# EAGLE board jr-support_v3 (EAGLE 8.2.1), part 1 of 2
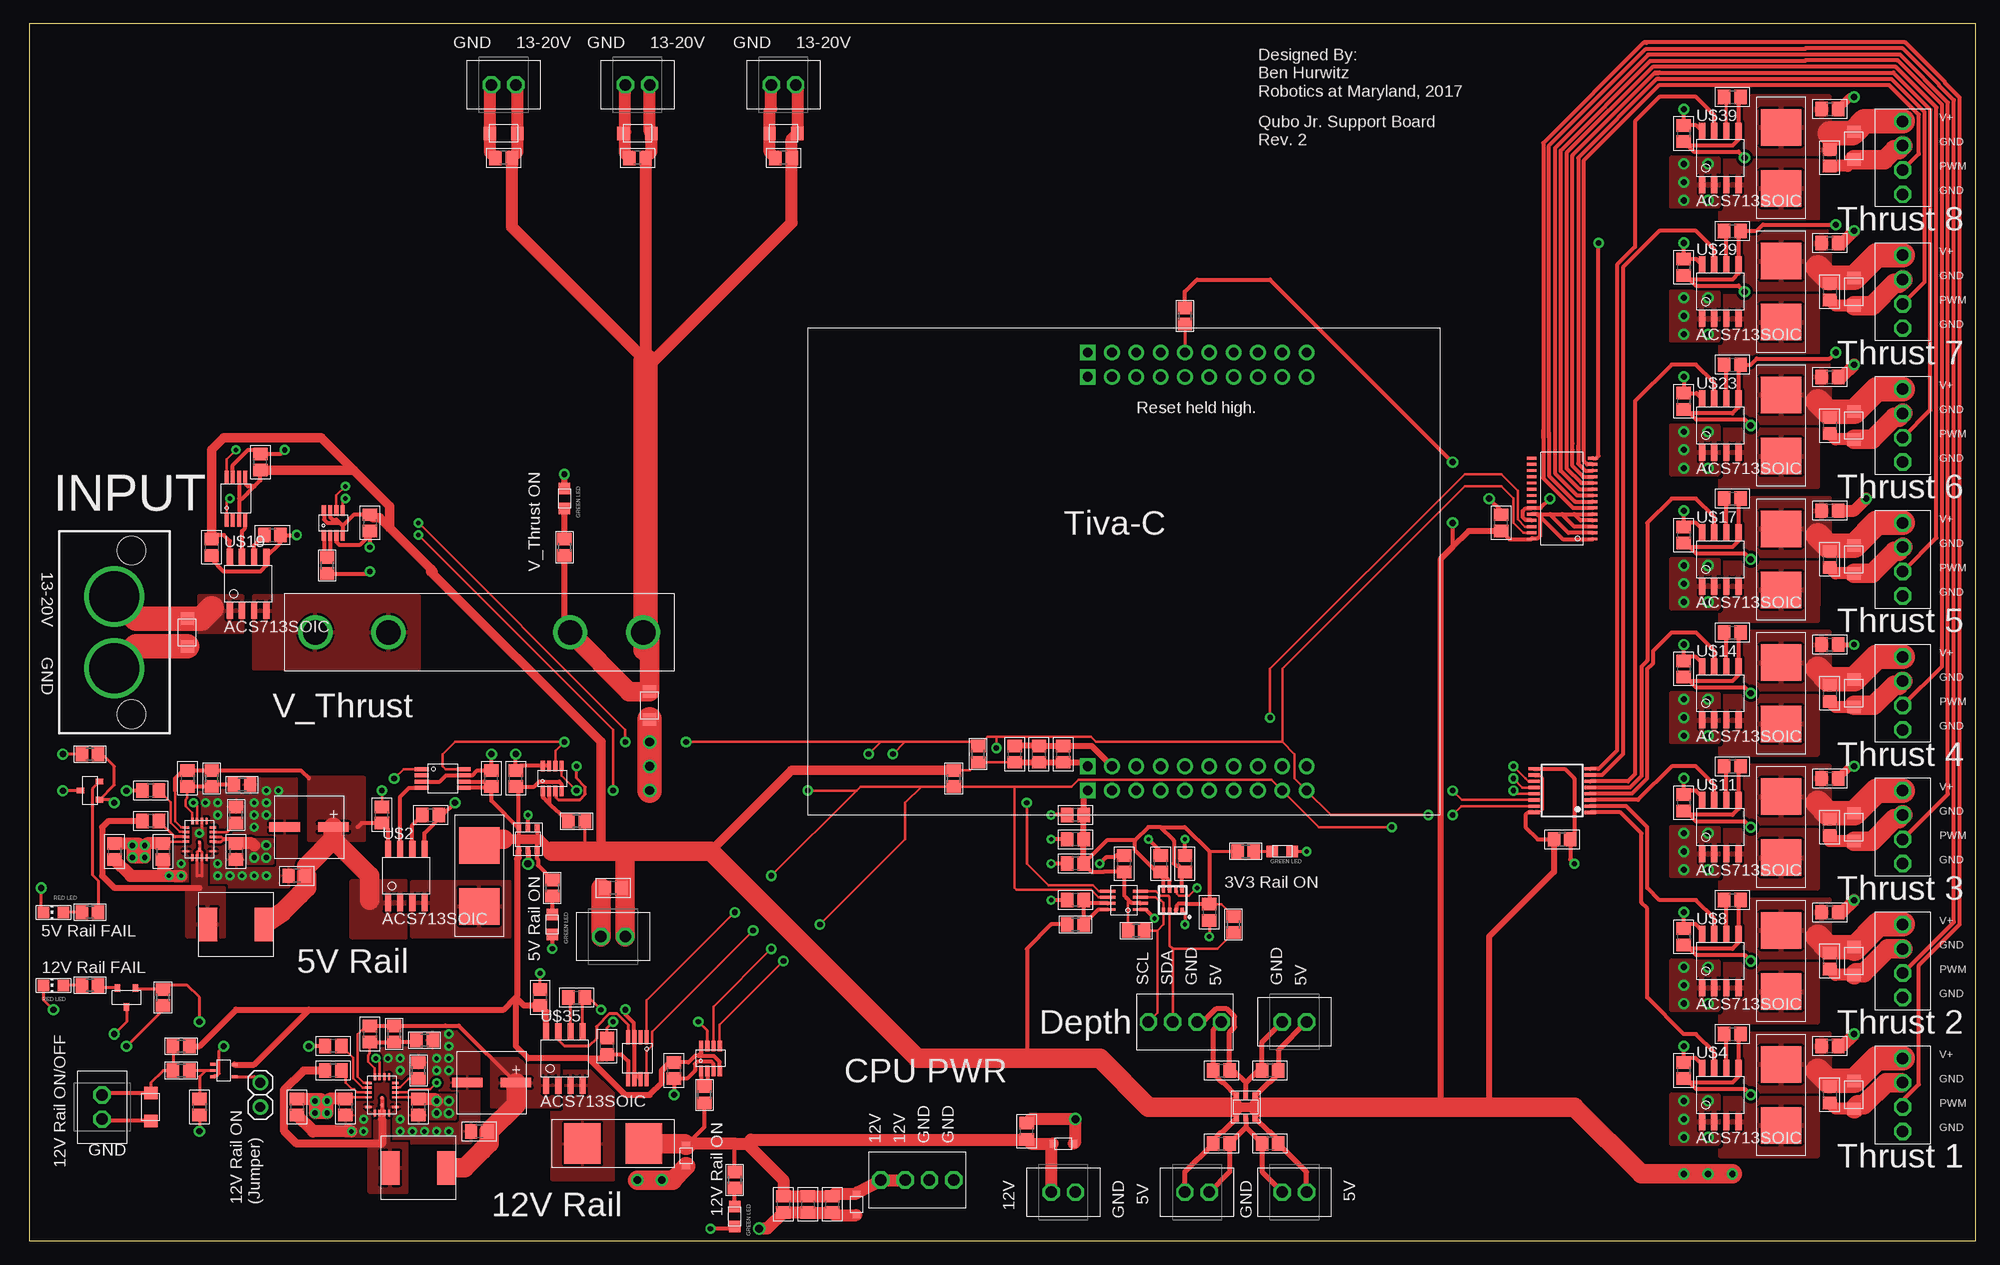
[diagram p0: board, top side]
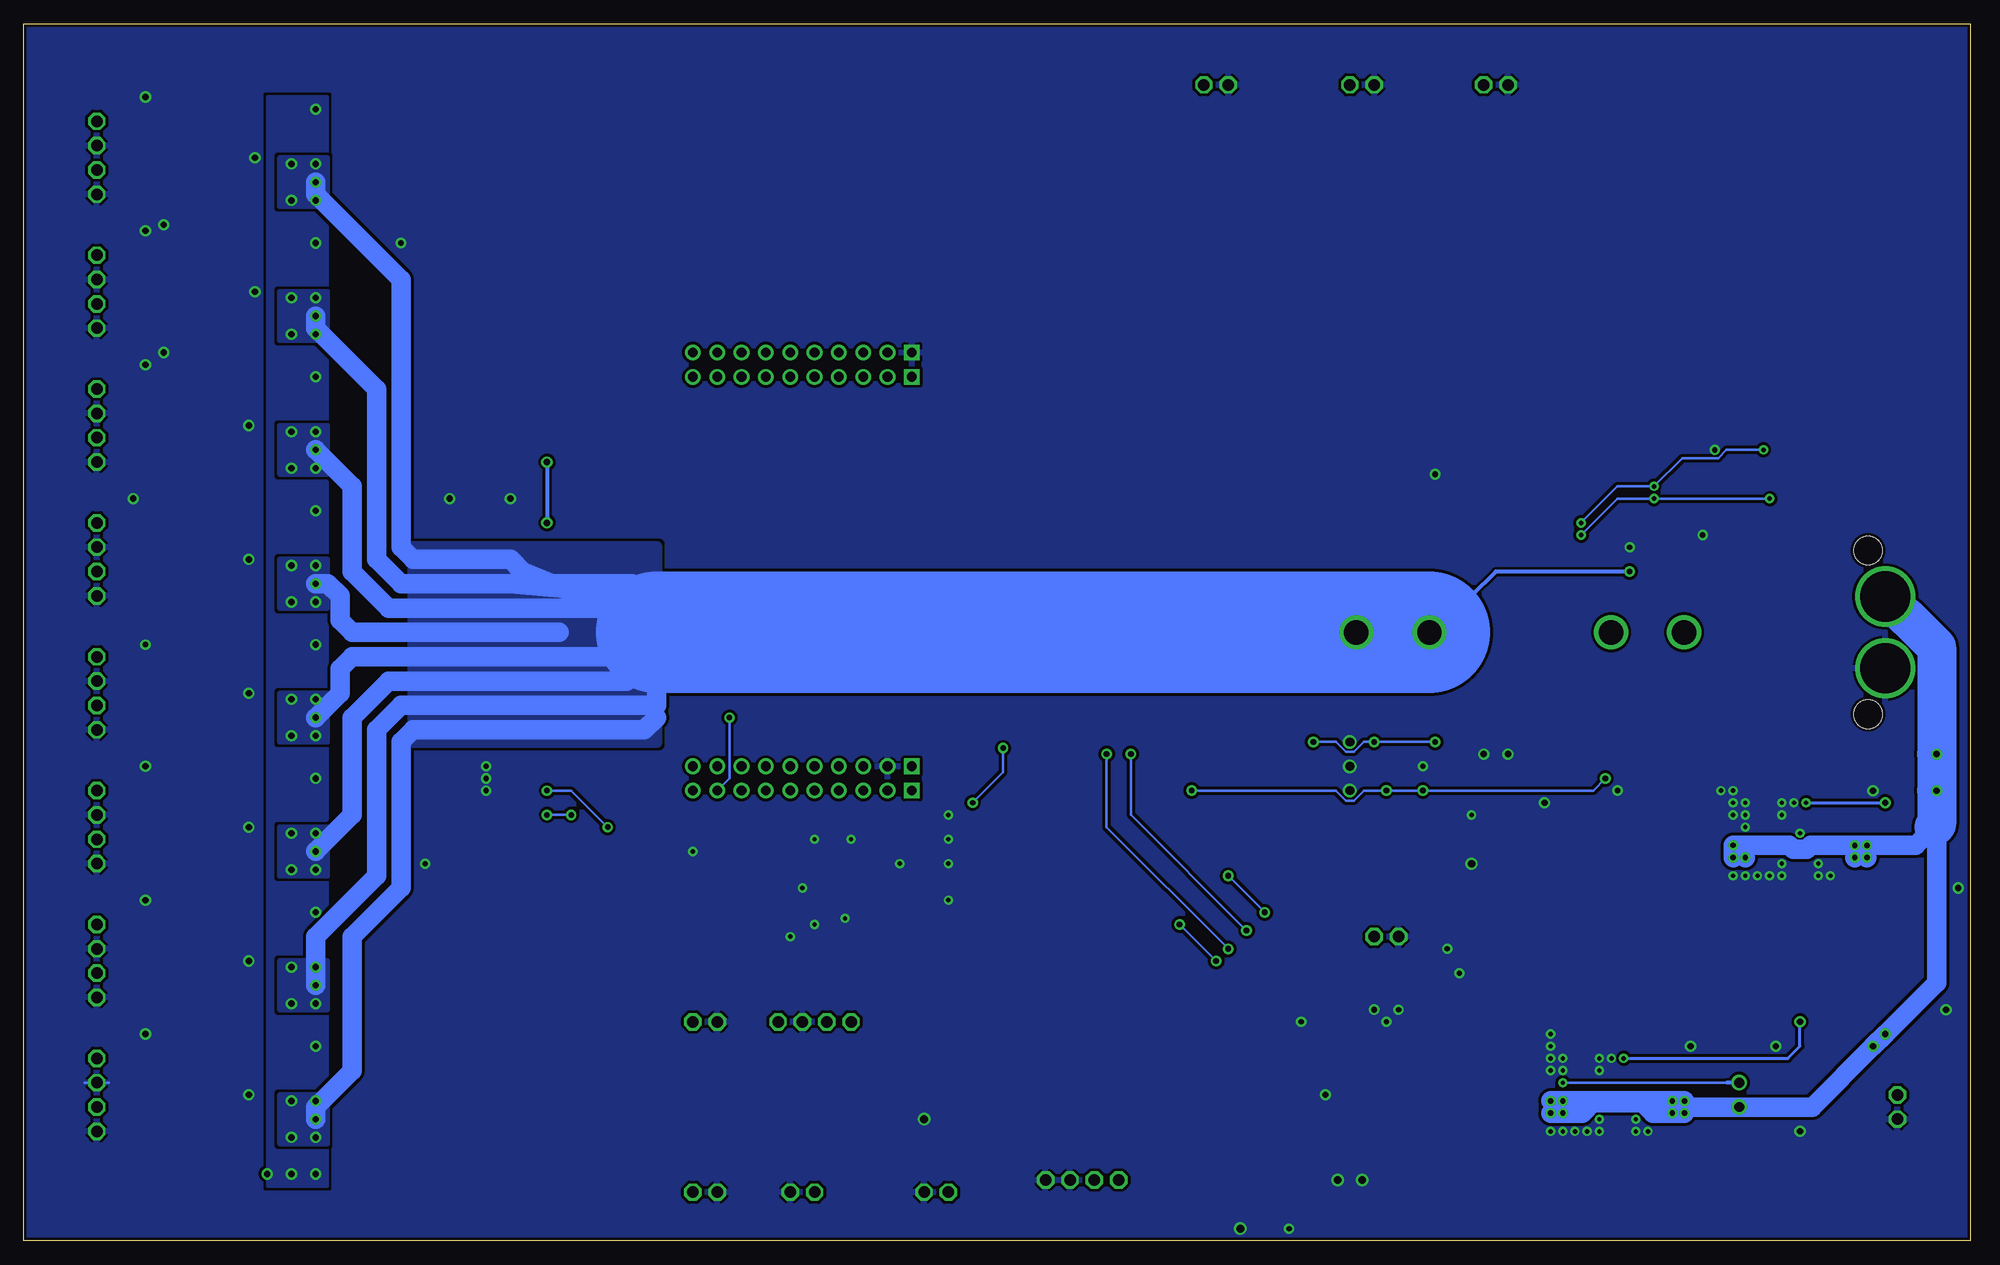
[diagram p1: board, bottom side, seen from below]

Size 203.18 x 127 mm. Coordinates in mm from the lower left corner, seen from the top.
Outline: 0,0 203.18,0 203.18,127 0,127 0,0
Copper layers (1*16): Top 0.035mm / dielectric 1.5mm / Bottom 0.035mm
Design rules "SparkFun *": minimum track width 8mil, minimum drill 15mil, track to track 8mil, track to pad 8mil, pad to pad 8mil, via to via 8mil, smd to smd 8mil, copper to edge 8mil, drill to drill 7mil, minimum pad ring 12mil, minimum via ring 10mil, stop-mask expansion 4mil, vias tented up to drill 20mil, thermal gap 10mil

## Footprints (pad centres in the part's own frame; a part is rotated, then mirrored left to right if it is on the bottom)
0805 = smd 1.2 x 1.2: P$1 -1.05,0; P$2 1.05,0
SOT457 = smd 0.5 x 0.8: P$1 -0.95,-1.15; P$2 0,-1.15; P$3 0.95,-1.15; P$4 0.95,1.15; P$5 0,1.15; P$6 -0.95,1.15
VSSOP-8 = smd 0.42 x 1.45: P$1 -0.975,-2.2; P$2 -0.325,-2.2; P$3 0.325,-2.2; P$4 0.975,-2.2; P$5 0.975,2.2; P$6 0.325,2.2; P$7 -0.325,2.2; P$8 -0.975,2.2
KK254_VERT_2PIN = drill 1.2 octagon: P$1 1.27,0; P$2 -1.27,0
CHIP-LED0805 = smd 1.2 x 1.2: A 0,-1.05; C 0,1.05
QFN18-3X4 = smd 0.25 x 0.7: 1 1.25,1.4; 2 0.75,1.4; 3 0.25,1.4; 4 -0.25,1.4; 6 -1.25,1.4; 11 -1.25,-1.4; 13 -0.25,-1.4; 14 0.25,-1.4; 15 0.75,-1.4; 16 1.25,-1.4 | smd 0.7 x 0.25: 7 -1.9,0.75; 8 -1.9,0.25; 9 -1.9,-0.25; 10 -1.9,-0.75; 17 1.9,-0.75; 18 1.9,-0.25; 19 1.9,0.25; 20 1.9,0.75 | smd 0.4 x 0.22: 21 -1.075,0 | smd 0.356 x 0.22: 22 -0.305,0
SOT-23-8 = smd 0.45 x 1.1: P$1 -0.975,-1.3; P$2 -0.325,-1.3; P$3 0.325,-1.3; P$4 0.975,-1.3; P$5 0.975,1.3; P$6 0.325,1.3; P$7 -0.325,1.3; P$8 -0.975,1.3
BME280_LGA = smd 0.5 x 0.35: P$1 1.025,0.975; P$2 1.025,0.325; P$3 1.025,-0.325; P$4 1.025,-0.975; P$5 -1.025,-0.975; P$6 -1.025,-0.325; P$7 -1.025,0.325; P$8 -1.025,0.975
C0805 = smd 1.3 x 1.5: 1 -0.85,0; 2 0.85,0
C-F80 = smd 1 x 3.2: P$1 0,2.55; P$2 0,-2.53
KK254_VERT_4PIN = drill 1.2 octagon: P$1 3.81,0; P$2 1.27,0; P$3 -1.27,0; P$4 -3.81,0
SM8 = smd 0.3 x 1.6: P$1 -0.975,-1.7; P$2 -0.34,-1.7; P$3 0.295,-1.7; P$4 0.93,-1.7; P$5 0.93,1.7; P$6 0.295,1.7; P$7 -0.34,1.7; P$8 -0.975,1.7
1X02 = drill 1.016: 1 -1.27,0; 2 1.27,0
SUPERSABRE_2CIRCUIT = drill 5.25: P$1 -3.747,0; P$2 3.747,0 | hole 2.997: -8.534,-1.803; 8.534,-1.803
L0740 = smd 2 x 3.5: P$1 -2.95,0; P$2 2.95,0
R0805 = smd 1.3 x 1.5: 1 -0.85,0; 2 0.85,0
TSSOP16 = smd 0.35 x 1.2: 1 -2.275,-2.925; 2 -1.625,-2.925; 3 -0.975,-2.925; 4 -0.325,-2.925; 5 0.325,-2.925; 6 0.975,-2.925; 7 1.625,-2.925; 8 2.275,-2.925; 9 2.275,2.925; 10 1.625,2.925; 11 0.975,2.925; 12 0.325,2.925; 13 -0.325,2.925; 14 -0.975,2.925; 15 -1.625,2.925; 16 -2.275,2.925
SOD-323 = smd 0.63 x 0.83: P$1 -1.115,0; P$2 1.115,0
TSSOP-28_4MM = smd 1 x 0.3: 1 -3.2,4.225; 2 -3.2,3.575; 3 -3.2,2.925; 4 -3.2,2.275; 5 -3.2,1.625; 6 -3.2,0.975; 7 -3.2,0.325; 8 -3.2,-0.325; 9 -3.2,-0.975; 10 -3.2,-1.625; 11 -3.2,-2.275; 12 -3.2,-2.925; 13 -3.2,-3.575; 14 -3.2,-4.225; 15 3.2,-4.225; 16 3.2,-3.575; 17 3.2,-2.925; 18 3.2,-2.275; 19 3.2,-1.625; 20 3.2,-0.975; 21 3.2,-0.325; 22 3.2,0.325; 23 3.2,0.975; 24 3.2,1.625; 25 3.2,2.275; 26 3.2,2.925; 27 3.2,3.575; 28 3.2,4.225
SOT-346-3/S-MINI = smd 0.6 x 0.8: P$1 -0.95,-1; P$2 0.95,-1; P$3 0,1
ACS713-SOIC = smd 0.65 x 1.75: P$1 -1.905,-2.8; P$2 -0.635,-2.8; P$3 0.635,-2.8; P$4 1.905,-2.8; P$5 1.905,2.8; P$6 0.635,2.8; P$7 -0.635,2.8; P$8 -1.905,2.8
TIVA-C_EVAL = drill 1.016 square: 1-1 -22.86,3.81; 2-1 22.86,3.81; 3-1 -20.32,3.81; 4-1 20.32,3.81 | drill 1.016: 1-2 -22.86,1.27; 1-3 -22.86,-1.27; 1-4 -22.86,-3.81; 1-5 -22.86,-6.35; 1-6 -22.86,-8.89; 1-7 -22.86,-11.43; 1-8 -22.86,-13.97; 1-9 -22.86,-16.51; 1-10 -22.86,-19.05; 2-2 22.86,1.27; 2-3 22.86,-1.27; 2-4 22.86,-3.81; 2-5 22.86,-6.35; 2-6 22.86,-8.89; 2-7 22.86,-11.43; 2-8 22.86,-13.97; 2-9 22.86,-16.51; 2-10 22.86,-19.05; 3-2 -20.32,1.27; 3-3 -20.32,-1.27; 3-4 -20.32,-3.81; 3-5 -20.32,-6.35; 3-6 -20.32,-8.89; 3-7 -20.32,-11.43; 3-8 -20.32,-13.97; 3-9 -20.32,-16.51; 3-10 -20.32,-19.05; 4-2 20.32,1.27; 4-3 20.32,-1.27; 4-4 20.32,-3.81; 4-5 20.32,-6.35; 4-6 20.32,-8.89; 4-7 20.32,-11.43; 4-8 20.32,-13.97; 4-9 20.32,-16.51; 4-10 20.32,-19.05
1.25"_FUSECLIPS = drill 2.54: P$1 -17.107,0; P$2 -9.487,0; P$3 9.487,0; P$4 17.107,0
154-OMNI-BLOK = smd 3.81 x 4.242: P$1 -3.188,0; P$2 3.188,0
DO-219AB = smd 1.3 x 1.4: P$1 -1.45,0; P$2 1.45,0
TSSOP5 = smd 0.3 x 0.6: P$1 -0.65,-1.125; P$2 0,-1.125; P$3 0.65,-1.125; P$4 0.65,1.125; P$5 -0.62,1.125

## Placement (x,y rotation side)
3V3_LED  [0805]  130.81,40.64 0 top
5-TVS_1  BZA408B  [SOT457]  52.07,41.91 0 top
5-TVS_2  BZA408B  [SOT457]  127,13.97 0 top
5V_CURR_ADC  ADC121C021  [VSSOP-8]  43.18,48.26 270 top
5V_LED  [0805]  54.61,33.02 270 top
5V_OUT  5V_OUT  [KK254_VERT_2PIN]  60.96,31.75 0 top
5V_PG  Red  [CHIP-LED0805]  2.54,34.29 90 top
5V_REG  LT8640  [QFN18-3X4]  17.78,41.91 90 top
5V_VOLTAGE  INA219SOT23  [SOT-23-8]  54.61,48.26 0 top
12V_CURR_ADC  ADC121C021  [VSSOP-8]  63.5,19.05 180 top
12V_LED  [0805]  73.66,2.54 270 top
12V_OUT  12V_OUT  [KK254_VERT_2PIN]  107.95,5.08 180 top
12V_REG  LT8640  [QFN18-3X4]  36.83,15.24 90 top
12V_VOLTAGE  INA219SOT23  [SOT-23-8]  71.12,19.05 0 top
BME280  BME280  [BME280_LGA]  119.38,35.56 270 top
C1  0.1u  [C0805]  53.34,25.4 90 top
C2  0.1u  [C0805]  36.83,44.45 90 top
C3  47n  [C0805]  41.91,44.45 0 top
C4  1u  [C0805]  33.02,13.97 270 top
C5  0.1u  [C0805]  172.72,17.78 270 top
C6  47n  [C0805]  177.8,21.59 0 top
C7  1u  [C0805]  50.8,48.26 90 top
C8  0.1u  [C0805]  172.72,31.75 270 top
C9  47n  [C0805]  177.8,35.56 0 top
C10  10u  [C0805]  187.96,29.21 270 top
C11  0.1u  [C0805]  172.72,45.72 270 top
C12  47n  [C0805]  177.8,49.53 0 top
C13  10u  [C0805]  187.96,43.18 270 top
C14  0.1u  [C0805]  172.72,59.69 270 top
C15  47n  [C0805]  177.8,63.5 0 top
C16  10u  [C0805]  187.96,57.15 270 top
C17  0.1u  [C0805]  172.72,73.66 270 top
C18  47n  [C0805]  177.8,77.47 0 top
C19  0.1u  [C0805]  19.05,72.39 270 top
C20  47n  [C0805]  25.4,73.66 0 top
C21  10u  [C0805]  187.96,71.12 270 top
C22  0.1u  [C0805]  172.72,87.63 270 top
C23  100p  [C0805]  109.22,35.56 180 top
C24  100n  [C0805]  120.65,39.37 90 top
C25  100n  [C0805]  118.11,39.37 90 top
C26  100n  [C0805]  123.19,34.29 270 top
C27  10u  [C0805]  27.94,13.97 270 top
C28  15p  [C0805]  35.56,21.59 270 top
C29  47n  [C0805]  177.8,91.44 0 top
C30  10u  [C0805]  187.96,85.09 270 top
C31  47n  [C0805]  57.15,25.4 0 top
C32  1u  [C0805]  17.78,13.97 270 top
C33  0.1u  [C0805]  172.72,101.6 270 top
C34  1u  [C0805]  40.64,13.97 270 top
C35  22u  [C0805]  46.99,11.43 180 top
C36  220u  [C-F80]  48.26,16.51 270 top
C37  47n  [C0805]  177.8,105.41 0 top
C38  1u  [C0805]  13.97,40.64 270 top
C39  1u  [C0805]  31.75,20.32 180 top
C40  10u  [C0805]  8.89,40.64 270 top
C41  0.1u  [C0805]  31.75,17.78 180 top
C42  15p  [C0805]  16.51,48.26 270 top
C43  0.1u  [C0805]  124.46,17.78 0 top
C44  100p  [C0805]  114.3,39.37 90 top
C45  1n  [C0805]  83.82,3.81 270 top
C46  0.1u  [C0805]  49.53,113.03 180 top
C47  0.1u  [C0805]  63.5,113.03 180 top
C48  0.1u  [C0805]  124.46,10.16 0 top
C49  0.1u  [C0805]  78.74,113.03 180 top
C50  0.1u  [C0805]  104.14,11.43 90 top
C51  0.1u  [C0805]  60.96,36.83 180 top
C52  0.1u  [C0805]  187.96,118.11 0 top
C53  4.7u  [C0805]  102.87,50.8 90 top
C54  10u  [C0805]  187.96,15.24 270 top
C55  10u  [C0805]  187.96,99.06 270 top
C56  0.1u  [C0805]  172.72,115.57 270 top
C57  47n  [C0805]  177.8,119.38 0 top
C58  10u  [C0805]  187.96,113.03 270 top
C60  1u  [C0805]  21.59,40.64 270 top
C61  22u  [C0805]  27.94,38.1 180 top
C62  220u  [C-F80]  29.21,43.18 270 top
C63  1u  [C0805]  12.7,46.99 180 top
C65  0.1u  [C0805]  12.7,43.81 180 top
C67  0.1u  [C0805]  129.54,17.78 180 top
C68  0.1u  [C0805]  129.54,10.16 180 top
C77  0.1u  [C0805]  81.28,3.81 270 top
C78  4.7u  [C0805]  78.74,3.81 270 top
C81  0.1u  [C0805]  105.41,50.8 90 top
C82  1n  [C0805]  107.95,50.8 90 top
C83  4.7u  [C0805]  109.22,39.37 180 top
C84  0.1u  [C0805]  109.22,41.91 180 top
C85  1n  [C0805]  109.22,44.45 180 top
C86  0.1u  [C0805]  187.96,20.32 0 top
C87  0.1u  [C0805]  187.96,48.26 0 top
C88  0.1u  [C0805]  187.96,34.29 0 top
C89  0.1u  [C0805]  187.96,62.23 0 top
C90  0.1u  [C0805]  187.96,90.17 0 top
C91  0.1u  [C0805]  187.96,76.2 0 top
C92  0.1u  [C0805]  187.96,104.14 0 top
C93  1u  [C0805]  24.13,81.28 90 top
C95  1u  [C0805]  35.56,74.93 270 top
C96  1u  [C0805]  67.31,17.78 270 top
C97  1u  [C0805]  60.33,20.32 90 top
C98  1u  [C0805]  160.02,41.91 0 top
C99  1u  [C0805]  153.67,74.93 90 top
C100  1u  [C0805]  48.26,48.26 90 top
CAMERA1  KK254_VERT_2PIN22-29-2021  [KK254_VERT_2PIN]  49.53,120.65 0 top
CAMERA2  KK254_VERT_2PIN22-29-2021  [KK254_VERT_2PIN]  63.5,120.65 0 top
CPU_ON  KK254_VERT_2PIN22-29-2021  [KK254_VERT_2PIN]  7.62,13.97 90 top
CPU_PWR  CPU PWR  [KK254_VERT_4PIN]  92.71,6.35 0 top
DEPTH_SENS  Depth Sensor  [KK254_VERT_4PIN]  120.65,22.86 180 top
ETHERNET  KK254_VERT_2PIN22-29-2021  [KK254_VERT_2PIN]  121.92,5.08 180 top
FAN1  KK254_VERT_2PIN22-29-2021  [KK254_VERT_2PIN]  132.08,22.86 0 top
FAN2  KK254_VERT_2PIN22-29-2021  [KK254_VERT_2PIN]  132.08,5.08 0 top
I2C_SHIFT  [SM8]  114.3,35.56 90 top
JP1  [1X02]  24.13,15.24 90 top
JP2  2_SUPERSABRE  [SUPERSABRE_2CIRCUIT]  8.89,63.5 90 top
L1  2.2u  [L0740]  21.59,33.02 0 top
L2  2.2u  [L0740]  40.64,7.62 0 top
LED2  RED  [CHIP-LED0805]  2.54,26.67 90 top
R1  10k  [R0805]  120.65,96.52 90 top
R2  1.2k  [R0805]  6.35,34.29 0 top
R3  50k  [R0805]  6.35,50.8 180 top
R7  4.7k  [R0805]  99.06,50.8 270 top
R8  4.7k  [R0805]  96.52,48.26 90 top
R10  4.2k  [R0805]  125.73,33.02 90 top
R11  4.2k  [R0805]  115.57,32.38 180 top
R12  200k  [R0805]  109.22,33.02 180 top
R14  41.2k  [R0805]  40.64,17.78 270 top
R15  1M  [R0805]  38.1,21.59 90 top
R16  88.7k  [R0805]  41.27,20.95 180 top
R17  41.2k  [R0805]  21.59,44.45 270 top
R18  510  [R0805]  15.88,17.78 0 top
R21  6.8k  [R0805]  15.88,20.32 0 top
R23  1M  [R0805]  19.05,48.26 90 top
R24  243k  [R0805]  22.23,47.62 180 top
R25  10  [R0805]  70.48,15.24 90 top
R30  10  [R0805]  31.11,70.48 90 top
R31  270  [R0805]  54.61,36.83 90 top
R32  1.5k  [R0805]  55.88,72.39 270 top
R33  1.2k  [R0805]  73.66,6.35 90 top
R34  68  [R0805]  127,40.64 180 top
R35  10  [R0805]  57.15,43.81 180 top
R38  1.2k  [R0805]  6.35,26.67 0 top
R40  50k  [R0805]  13.97,25.4 270 top
THRUST1  KK254_VERT_4PIN22-29-2041  [KK254_VERT_4PIN]  195.58,15.24 270 top
THRUST2  KK254_VERT_4PIN22-29-2041  [KK254_VERT_4PIN]  195.58,29.21 270 top
THRUST3  KK254_VERT_4PIN22-29-2041  [KK254_VERT_4PIN]  195.58,43.18 270 top
THRUST4  KK254_VERT_4PIN22-29-2041  [KK254_VERT_4PIN]  195.58,57.15 270 top
THRUST5  KK254_VERT_4PIN22-29-2041  [KK254_VERT_4PIN]  195.58,71.12 270 top
THRUST6  KK254_VERT_4PIN22-29-2041  [KK254_VERT_4PIN]  195.58,85.09 270 top
THRUST7  KK254_VERT_4PIN22-29-2041  [KK254_VERT_4PIN]  195.58,99.06 270 top
THRUST8  KK254_VERT_4PIN22-29-2041  [KK254_VERT_4PIN]  195.58,113.03 270 top
THRUSTER_CURR_ADC  ADS7828  [TSSOP16]  160.02,46.99 90 top
TVS1  [SOD-323]  68.58,8.89 270 top
TVS2  [SOD-323]  107.95,10.16 0 top
TVS3  [SOD-323]  86.36,3.81 270 top
U1  PCA9685  [TSSOP-28_4MM]  160.02,77.47 180 top
U$1  SSM3J353F  [SOT-346-3/S-MINI]  6.35,46.99 90 top
U$2  ACS713SOIC  [ACS713-SOIC]  39.37,38.1 0 top
U$3  TIVA-C_EVAL  [TIVA-C_EVAL]  114.3,69.85 90 top
U$4  ACS713SOIC  [ACS713-SOIC]  176.53,15.24 0 top
U$5  25A Fuse  [1.25"_FUSECLIPS]  46.99,63.5 0 top
U$6  4A Fuse  [154-OMNI-BLOK]  182.88,15.24 90 top
U$7  VTVS  [DO-219AB]  16.51,63.5 90 top
U$8  ACS713SOIC  [ACS713-SOIC]  176.53,29.21 0 top
U$9  4A Fuse  [154-OMNI-BLOK]  182.88,29.21 90 top
U$10  VTVS  [DO-219AB]  190.5,114.3 90 top
U$11  ACS713SOIC  [ACS713-SOIC]  176.53,43.18 0 top
U$12  4A Fuse  [154-OMNI-BLOK]  182.88,43.18 90 top
U$13  VTVS  [DO-219AB]  190.5,85.09 90 top
U$14  ACS713SOIC  [ACS713-SOIC]  176.53,57.15 0 top
U$15  4A Fuse  [154-OMNI-BLOK]  182.88,57.15 90 top
U$16  VTVS  [DO-219AB]  190.5,99.06 90 top
U$17  ACS713SOIC  [ACS713-SOIC]  176.53,71.12 0 top
U$18  4A Fuse  [154-OMNI-BLOK]  182.88,71.12 90 top
U$19  ACS713SOIC  [ACS713-SOIC]  22.86,68.58 0 top
U$20  4A Fuse  [154-OMNI-BLOK]  46.99,38.1 90 top
U$22  VTVS  [DO-219AB]  190.5,71.12 90 top
U$23  ACS713SOIC  [ACS713-SOIC]  176.53,85.09 0 top
U$26  VTVS  [DO-219AB]  190.5,43.18 90 top
U$27  4A Fuse  [154-OMNI-BLOK]  182.88,85.09 90 top
U$28  VTVS  [DO-219AB]  190.5,57.15 90 top
U$29  ACS713SOIC  [ACS713-SOIC]  176.53,99.06 0 top
U$30  VTVS  [DO-219AB]  190.5,29.21 90 top
U$31  VTVS  [DO-219AB]  190.5,15.24 90 top
U$32  VTVS  [DO-219AB]  49.53,115.57 0 top
U$33  VTVS  [DO-219AB]  63.5,115.57 0 top
U$34  VTVS  [DO-219AB]  78.74,115.57 0 top
U$35  ACS713SOIC  [ACS713-SOIC]  55.88,19.05 0 top
U$36  4A Fuse  [154-OMNI-BLOK]  60.96,10.16 0 top
U$37  4A Fuse  [154-OMNI-BLOK]  182.88,99.06 90 top
U$38  VTVS  [DO-219AB]  64.77,55.88 90 top
U$39  ACS713SOIC  [ACS713-SOIC]  176.53,113.03 0 top
U$40  4A Fuse  [154-OMNI-BLOK]  182.88,113.03 90 top
U$45  74LVC1G14  [TSSOP5]  20.32,17.78 270 top
U$59  VTVS  [DO-219AB]  12.7,13.97 90 top
U$66  SSM3J353F  [SOT-346-3/S-MINI]  10.16,25.4 180 top
V-THRUST_CURR_ADC  ADC121C021  [VSSOP-8]  21.59,77.47 0 top
V-THRUST_LED  [0805]  55.88,77.47 90 top
V-THRUST_OUT  Vin_OUT  [KK254_VERT_2PIN]  78.74,120.65 0 top
V-THRUST_VOLTAGE  INA219SOT23  [SOT-23-8]  31.75,74.93 0 top

## Library data of the parts
3V3_LED 5V_LED 5V_PG 12V_LED LED2 V-THRUST_LED = led
5-TVS_1 5-TVS_2 = diodes
5V_CURR_ADC 5V_VOLTAGE 12V_CURR_ADC 12V_VOLTAGE I2C_SHIFT THRUSTER_CURR_ADC U$3 V-THRUST_CURR_ADC V-THRUST_VOLTAGE = texas
5V_OUT 12V_OUT CAMERA1 CAMERA2 CPU_ON CPU_PWR DEPTH_SENS ETHERNET FAN1 FAN2 JP2 THRUST1-THRUST8 V-THRUST_OUT = molex
5V_REG 12V_REG = linear
BME280 = BME280ComponentLibrary; PROD_ID: IC-13090
C1-C58 C60-C63 C65 C67 C68 C77 C78 C81-C93 C95-C100 L1 L2 R1-R3 R7 R8 R10-R12 R14-R18 R21 R23-R25 R30-R35 R38 R40 = resistor
JP1 = pinhead
TVS1-TVS3 U$7 U$10 U$13 U$16 U$22 U$26 U$28 U$30-U$34 U$38 U$59 = diode
U1 = NXP; PROD_ID: IC-12240
U$1 U$66 = transistors
U$2 U$4 U$8 U$11 U$14 U$17 U$19 U$23 U$29 U$35 U$39 = allegro
U$5 U$6 U$9 U$12 U$15 U$18 U$20 U$27 U$36 U$37 U$40 = littelfuse
U$45 = NXP

## Nets
3V3: BME280.P$2 BME280.P$5 BME280.P$6 BME280.P$8 C24.1 C25.1 C26.1 C44.1 C83.1 C84.1 C85.1 I2C_SHIFT.P$2 R10.2 R11.2 R34.2 U$3.1-1
5V: 5-TVS_1.P$1 5-TVS_1.P$3 5-TVS_1.P$4 5-TVS_1.P$6 5-TVS_2.P$1 5-TVS_2.P$3 5-TVS_2.P$4 5-TVS_2.P$6 5V_CURR_ADC.P$5 5V_CURR_ADC.P$6 5V_OUT.P$1 5V_VOLTAGE.P$4 12V_CURR_ADC.P$5 12V_VOLTAGE.P$4 12V_VOLTAGE.P$8 C1.1 C5.1 C7.1 C8.1 C11.1 C14.1 C17.1 C19.1 C22.1 C33.1 C43.1 C48.1 C51.1 C53.1 C56.1 C67.1 C68.1 C81.1 C82.1 C93.1 C95.1 C96.1 C97.1 C98.1 C99.1 C100.1 DEPTH_SENS.P$4 ETHERNET.P$1 FAN1.P$1 FAN2.P$1 R1.2 R7.2 R8.2 R12.2 R21.2 R31.2 R35.1 THRUSTER_CURR_ADC.10 THRUSTER_CURR_ADC.16 U1.1 U1.2 U1.3 U1.4 U1.5 U1.24 U1.28 U$3.3-1 U$4.P$8 U$8.P$8 U$11.P$8 U$14.P$8 U$17.P$8 U$19.P$8 U$20.P$2 U$23.P$8 U$29.P$8 U$35.P$8 U$39.P$8 U$45.P$5 V-THRUST_CURR_ADC.P$3 V-THRUST_CURR_ADC.P$5 V-THRUST_CURR_ADC.P$6 V-THRUST_VOLTAGE.P$4 V-THRUST_VOLTAGE.P$7 V-THRUST_VOLTAGE.P$8
+12V: 12V_OUT.P$1 C45.1 C50.1 C77.1 C78.1 CPU_PWR.P$3 CPU_PWR.P$4 R25.1 R33.2 TVS1.P$1 TVS2.P$1 TVS3.P$1 U$36.P$2
AIN0: U$3.3-9
AIN1: U$3.3-8
AIN2: U$3.3-7
AIN3: U$3.2-3
AIN4: U$3.3-6
AIN5: U$3.3-5
AIN8: U$3.1-6
AIN9: U$3.1-5
AIN10: U$3.1-7
AIN11: U$3.1-2
CPU_ON: 12V_REG.14 JP1.2 U$45.P$4
GND: 3V3_LED.P$2 5-TVS_1.P$2 5-TVS_1.P$5 5-TVS_2.P$2 5-TVS_2.P$5 5V_CURR_ADC.P$3 5V_CURR_ADC.P$7 5V_LED.P$2 5V_OUT.P$2 5V_PG.C 5V_REG.6 5V_REG.7 5V_REG.10 5V_REG.11 5V_REG.18 5V_VOLTAGE.P$3 5V_VOLTAGE.P$7 5V_VOLTAGE.P$8 12V_CURR_ADC.P$3 12V_CURR_ADC.P$6 12V_CURR_ADC.P$7 12V_LED.P$2 12V_OUT.P$2 12V_REG.6 12V_REG.7 12V_REG.10 12V_REG.11 12V_REG.18 12V_VOLTAGE.P$3 12V_VOLTAGE.P$7 BME280.P$1 BME280.P$7 C1.2 C2.2 C3.2 C4.2 C5.2 C6.2 C7.2 C8.2 C9.2 C10.2 C11.2 C12.2 C13.2 C14.2 C15.2 C16.2 C17.2 C18.2 C19.2 C20.2 C21.2 C22.2 C23.2 C24.2 C25.2 C26.2 C27.2 C29.2 C30.2 C31.2 C32.2 C33.2 C34.2 C35.2 C36.P$2 C37.2 C38.2 C39.2 C40.2 C43.2 C44.2 C45.2 C46.2 C47.2 C48.2 C49.2 C50.2 C51.2 C52.2 C53.2 C54.2 C55.2 C56.2 C57.2 C58.2 C60.2 C61.2 C62.P$2 C63.2 C67.2 C68.2 C77.2 C78.2 C81.2 C82.2 C83.2 C84.2 C85.2 C86.2 C87.2 C88.2 C89.2 C90.2 C91.2 C92.2 C93.2 C95.2 C96.2 C97.2 C98.2 C99.2 C100.2 CAMERA1.P$2 CAMERA2.P$2 CPU_ON.P$2 CPU_PWR.P$1 CPU_PWR.P$2 DEPTH_SENS.P$3 ETHERNET.P$2 FAN1.P$2 FAN2.P$2 I2C_SHIFT.P$1 JP2.P$1 LED2.C R14.1 R16.1 R17.1 R24.1 THRUST1.P$1 THRUST1.P$3 THRUST2.P$1 THRUST2.P$3 THRUST3.P$1 THRUST3.P$3 THRUST4.P$1 THRUST4.P$3 THRUST5.P$1 THRUST5.P$3 THRUST6.P$1 THRUST6.P$3 THRUST7.P$1 THRUST7.P$3 THRUST8.P$1 THRUST8.P$3 THRUSTER_CURR_ADC.9 THRUSTER_CURR_ADC.11 THRUSTER_CURR_ADC.12 THRUSTER_CURR_ADC.13 TVS1.P$2 TVS2.P$2 TVS3.P$2 U1.14 U1.23 U1.25 U$2.P$5 U$3.2-1 U$3.3-2 U$4.P$5 U$7.P$1 U$8.P$5 U$10.P$1 U$11.P$5 U$13.P$1 U$14.P$5 U$16.P$1 U$17.P$5 U$19.P$5 U$22.P$1 U$23.P$5 U$26.P$1 U$28.P$1 U$29.P$5 U$30.P$1 U$31.P$1 U$32.P$1 U$33.P$1 U$34.P$1 U$35.P$5 U$38.P$1 U$39.P$5 U$45.P$3 U$59.P$1 V-THRUST_CURR_ADC.P$7 V-THRUST_LED.P$2 V-THRUST_OUT.P$2 V-THRUST_VOLTAGE.P$3
N$1: 12V_REG.15 R14.2
N$2: R1.1 U$3.2-5
N$4: 5V_PG.A R2.1
N$5: R2.2 U$1.P$2
N$6: 5V_REG.19 R3.1 U$1.P$1
N$7: 12V_REG.1 C28.1 C35.1 C36.P$1 L2.P$2 R15.2 U$35.P$1 U$35.P$2
N$8: 5V_REG.15 R17.2
N$11: C3.1 U$2.P$6
N$12: C9.1 U$8.P$6
N$13: C6.1 U$4.P$6
N$14: C54.1 C86.1 THRUST1.P$4 U$6.P$2 U$31.P$2
N$15: U$4.P$3 U$4.P$4 U$6.P$1
N$16: C10.1 C88.1 THRUST2.P$4 U$9.P$2 U$30.P$2
N$17: U$8.P$3 U$8.P$4 U$9.P$1
N$18: C12.1 U$11.P$6
N$19: C13.1 C87.1 THRUST3.P$4 U$12.P$2 U$26.P$2
N$20: U$11.P$3 U$11.P$4 U$12.P$1
N$21: C15.1 U$14.P$6
N$22: C16.1 C89.1 THRUST4.P$4 U$15.P$2 U$28.P$2
N$24: U$14.P$3 U$14.P$4 U$15.P$1
N$25: C18.1 U$17.P$6
N$26: C21.1 C91.1 THRUST5.P$4 U$18.P$2 U$22.P$2
N$27: U$17.P$3 U$17.P$4 U$18.P$1
N$28: C29.1 U$23.P$6
N$29: C30.1 C90.1 THRUST6.P$4 U$13.P$2 U$27.P$2
N$30: U$23.P$3 U$23.P$4 U$27.P$1
N$31: C37.1 U$29.P$6
N$32: 12V_REG.8 12V_REG.9 12V_REG.21 12V_REG.22 C41.2 L2.P$1
N$33: C20.1 U$19.P$6
N$34: U$5.P$1 U$5.P$2 U$19.P$3 U$19.P$4
N$36: C55.1 C92.1 THRUST7.P$4 U$16.P$2 U$37.P$2
N$37: U$29.P$3 U$29.P$4 U$37.P$1
N$38: C57.1 U$39.P$6
N$39: C52.1 C58.1 THRUST8.P$4 U$10.P$2 U$40.P$2
N$40: 5V_REG.8 5V_REG.9 5V_REG.21 5V_REG.22 C65.2 L1.P$1
N$41: C23.1 I2C_SHIFT.P$7 I2C_SHIFT.P$8 R12.1
N$42: 5V_REG.20 C42.2 R23.1 R24.2
N$43: 5V_REG.3 C65.1
N$44: 12V_REG.20 C28.2 R15.1 R16.2
N$45: 12V_REG.3 C41.1
N$47: U$39.P$3 U$39.P$4 U$40.P$1
N$48: 5V_REG.2 C63.1
N$49: 12V_VOLTAGE.P$1 12V_VOLTAGE.P$2 R25.2
N$52: C31.1 U$35.P$6
N$53: U$19.P$7 V-THRUST_CURR_ADC.P$4
N$54: 12V_REG.2 C39.1
N$55: U$2.P$3 U$2.P$4 U$20.P$1
N$56: U$35.P$3 U$35.P$4 U$36.P$1
N$57: 5V_CURR_ADC.P$4 U$2.P$7
N$58: R30.2 V-THRUST_VOLTAGE.P$1 V-THRUST_VOLTAGE.P$2
N$59: C32.1 R18.2 U$45.P$2
N$60: 12V_CURR_ADC.P$4 U$35.P$7
N$61: CPU_ON.P$1 R18.1 R21.1 U$59.P$2
N$71: 5V_LED.P$1 R31.1
N$72: R32.1 V-THRUST_LED.P$1
N$73: 12V_LED.P$1 R33.1
N$74: 3V3_LED.P$1 R34.1
N$77: 5V_VOLTAGE.P$1 5V_VOLTAGE.P$2 R35.2
N$78: LED2.A R38.1
N$79: R38.2 U$66.P$2
N$80: 12V_REG.19 R40.1 U$66.P$1
RELAY_OUT: 5V_REG.4 5V_REG.13 5V_REG.14 12V_REG.4 12V_REG.13 C4.1 C27.1 C34.1 C38.1 C40.1 C60.1 JP1.1 JP2.P$2 R3.2 R40.2 U$1.P$3 U$7.P$2 U$19.P$1 U$19.P$2 U$66.P$3
RX: U$3.1-3
SCL1: 5V_CURR_ADC.P$1 5V_VOLTAGE.P$5 12V_CURR_ADC.P$1 12V_VOLTAGE.P$5 I2C_SHIFT.P$6 R8.1 THRUSTER_CURR_ADC.14 U1.26 U$3.1-9 V-THRUST_CURR_ADC.P$1 V-THRUST_VOLTAGE.P$5
SCL3: U$3.2-7
SCL-3V3: BME280.P$4 DEPTH_SENS.P$1 I2C_SHIFT.P$3 R11.1
SDA1: 5V_CURR_ADC.P$8 5V_VOLTAGE.P$6 12V_CURR_ADC.P$8 12V_VOLTAGE.P$6 I2C_SHIFT.P$5 R7.1 THRUSTER_CURR_ADC.15 U1.27 U$3.1-10 V-THRUST_CURR_ADC.P$8 V-THRUST_VOLTAGE.P$6
SDA3: U$3.2-6
SDA-3V3: BME280.P$3 DEPTH_SENS.P$2 I2C_SHIFT.P$4 R10.1
SW-5V: 5V_REG.1 C2.1 C42.1 C61.1 C62.P$1 L1.P$2 R23.2 U$2.P$1 U$2.P$2 U$2.P$8
T1_CURR: THRUSTER_CURR_ADC.1 U$4.P$7
T1_PWM: THRUST1.P$2 U1.6
T2_CURR: THRUSTER_CURR_ADC.2 U$8.P$7
T2_PWM: THRUST2.P$2 U1.7
T3_CURR: THRUSTER_CURR_ADC.3 U$11.P$7
T3_PWM: THRUST3.P$2 U1.8
T4_CURR: THRUSTER_CURR_ADC.4 U$14.P$7
T4_PWM: THRUST4.P$2 U1.9
T5_CURR: THRUSTER_CURR_ADC.5 U$17.P$7
T5_PWM: THRUST5.P$2 U1.10
T6_CURR: THRUSTER_CURR_ADC.6 U$23.P$7
T6_PWM: THRUST6.P$2 U1.11
T7_CURR: THRUSTER_CURR_ADC.7 U$29.P$7
T7_PWM: THRUST7.P$2 U1.12
T8_CURR: THRUSTER_CURR_ADC.8 U$39.P$7
T8_PWM: THRUST8.P$2 U1.13
TX: U$3.1-4
V_THRUST: C46.1 C47.1 C49.1 CAMERA1.P$1 CAMERA2.P$1 R30.1 R32.2 U$4.P$1 U$4.P$2 U$5.P$3 U$5.P$4 U$8.P$1 U$8.P$2 U$11.P$1 U$11.P$2 U$14.P$1 U$14.P$2 U$17.P$1 U$17.P$2 U$23.P$1 U$23.P$2 U$29.P$1 U$29.P$2 U$32.P$2 U$33.P$2 U$34.P$2 U$38.P$2 U$39.P$1 U$39.P$2 V-THRUST_OUT.P$1